# Altium PCB PCB1.PcbDoc
Units mm, origin at the board's own origin, x right, y up, seen from the top; angles counter-clockwise.
Board outline 100 x 50 mm, 2 copper layers (Top Layer, Bottom Layer); 19 components, 19 nets, 54 pads, 0 vias.
Unrouted connection lines stored in the file: 30.
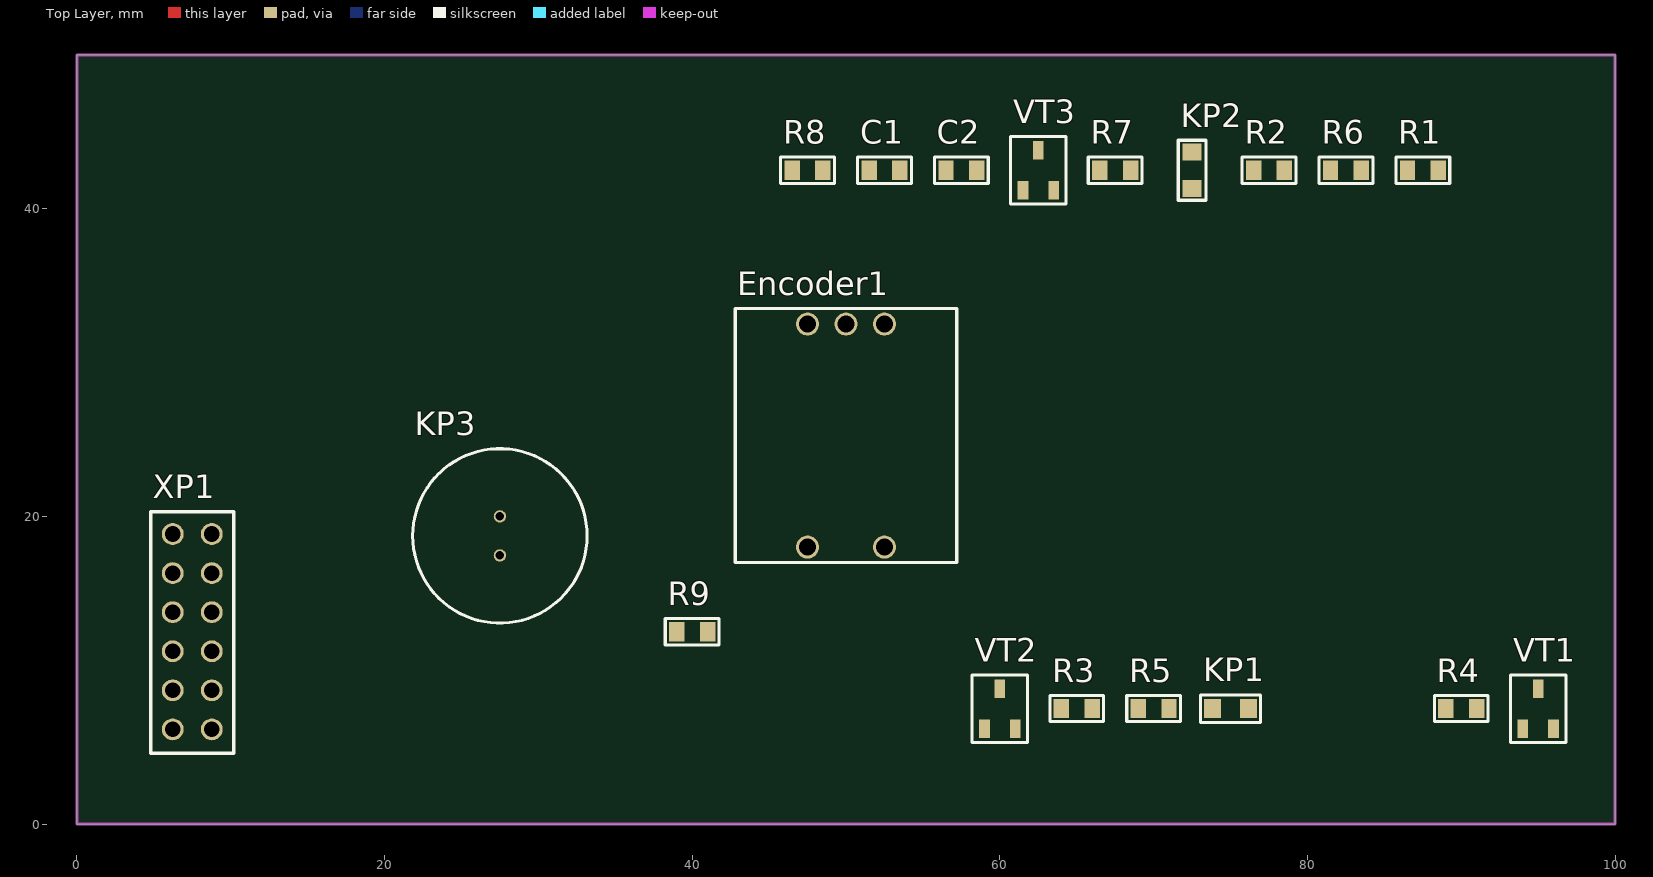
[diagram p0: Top Layer view]
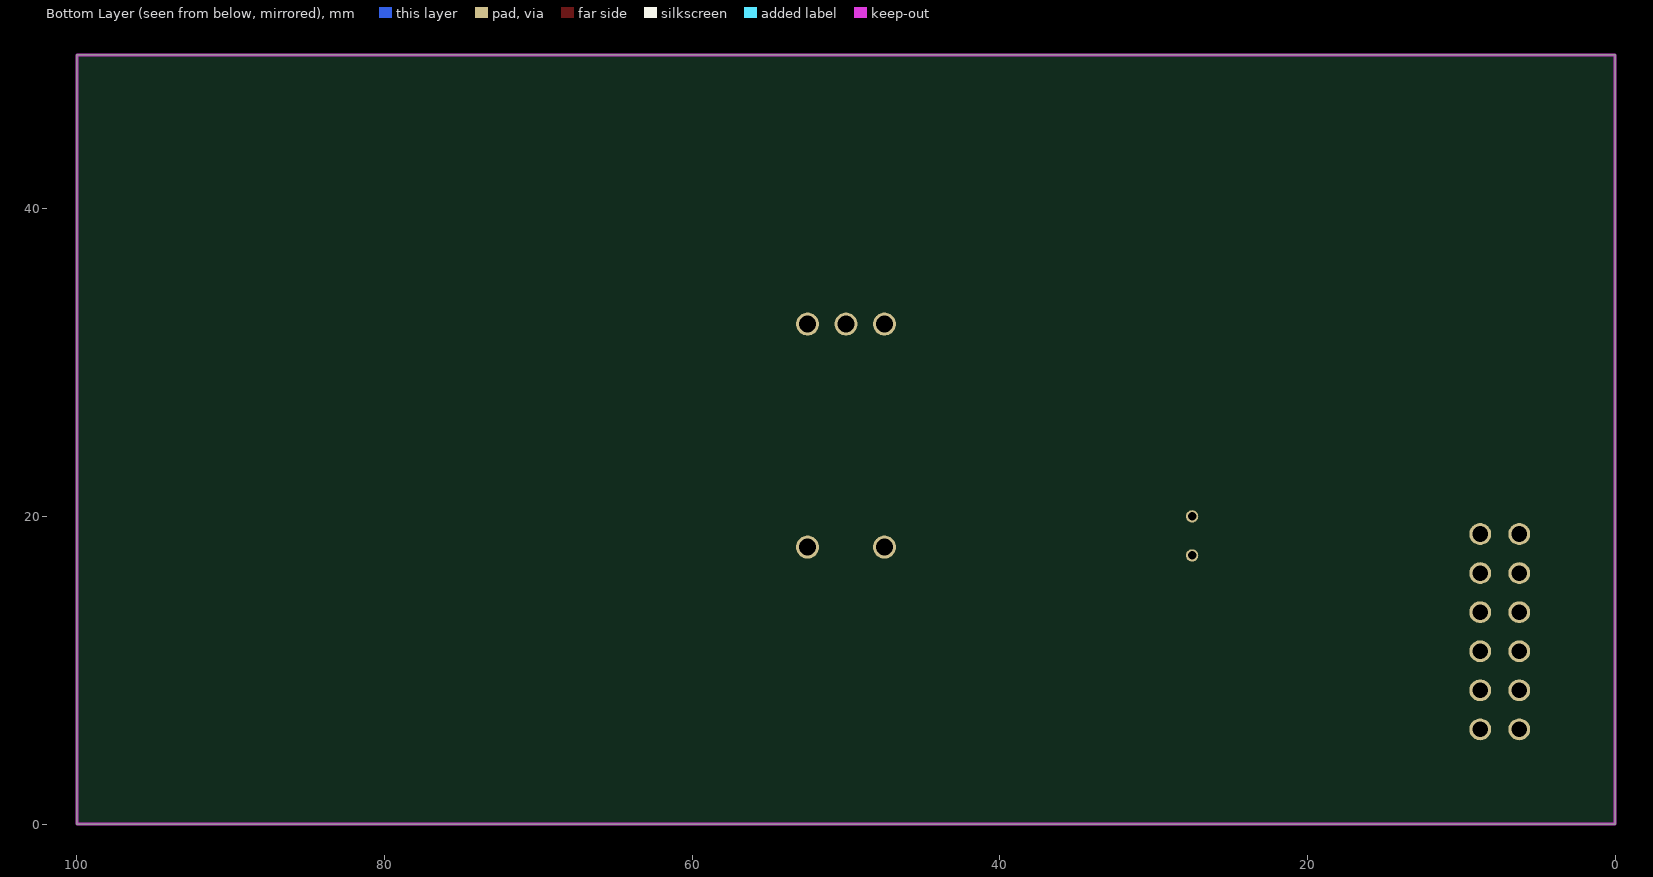
[diagram p1: Bottom Layer view, seen from below]

## Layer stack, top to bottom
Top Solder: solder mask 0.0102, Solder Resist, Dk 3.5
Top Layer: signal copper 0.0356
Dielectric 1: dielectric 0.32, FR-4, Dk 4.8
Bottom Layer: signal copper 0.0356
Bottom Solder: solder mask 0.0102, Solder Resist, Dk 3.5

## Board outline
0,0 100,0 100,50 0,50

## Design rules (kind name [scope] priority, off if disabled: settings)
Clearance [All] p1: gap=0.254 ignorepadtopadclearanceinfootprint=FALSE except(0: Arc-Hole Track-Hole SMDPad-Hole THPad-Hole Via-Hole Fill-Hole Poly-Hole Region-Hole Text-Hole)
PolygonConnect [All] p1: connectstyle=Relief reliefconductorwidth=0.254 reliefentries=4 polygonreliefangle="90 Angle" airgapwidth=0.254
RoutingVias [All] p1: holewidth=0.711 width=1.27 viastyle="Through Hole" minholewidth=0.711 minwidth=1.27 maxholewidth=0.711 maxwidth=1.27
SolderMaskExpansion [All] p1: expansion=0.102
Width [All] p1: maxlimit=0.254 minlimit=0.254 preferedwidth=0.254
30 further rules are at their usual default settings.

## Components (designator, comment, footprint, x,y, rotation, side; value= is the part's Value field where it differs from the comment)
C1 "0.01u" "Cap 0805" 52.5,42.5 r0 top
C2 "0.01u" "Cap 0805" 57.5,42.5 r0 top
Encoder1 "PEC11R-4115K-N0018" PEC11R-4115K-N0018 50,25 r180 top
KP1 "light" "KP LD RED" 75,7.5 r0 top
KP2 "light" "KP LD RED" 72.5,42.5 r90 top
KP3 "light" L-813SRC-B 27.5,18.73 r270 top
R1 "10k" "Res 0805" 87.5,42.5 r0 top
R2 "10k" "Res 0805" 77.5,42.5 r0 top
R3 "10k" "Res 0805" 65,7.5 r0 top
R4 "0.1k" "Res 0805" 90,7.5 r0 top
R5 "1k" "Res 0805" 70,7.5 r0 top
R6 "0.1k" "Res 0805" 82.5,42.5 r0 top
R7 "1k" "Res 0805" 67.5,42.5 r0 top
R8 "0.1k" "Res 0805" 47.5,42.5 r0 top
R9 "1k" "Res 0805" 40,12.5 r0 top
VT1 "bipolar_pnp" SOT-23 95,7.5 r0 top
VT2 "bipolar_pnp" SOT-23 60,7.5 r0 top
VT3 "bipolar_pnp" SOT-23 62.5,42.5 r0 top
XP1 "PBD-12" PBD-12 7.5,12.5 r90 top

## Footprints (in the part's own frame and the unit in brackets; to place one, negate y for a bottom-side part, rotate by r counter-clockwise, add the part's x,y. Pads: shape width x height; smd on the part's side, far side on the other; paste and mask are expansions set on the pad)
"Cap 0805" [mm]
  rect 1x1.25 smd: 1(-1,0) 2(1,0)
  silkscreen extent -1.75,-0.85 1.75,0.85, body extent -1,-0.62 1,0.63, height 1
"KP LD RED" [mm]
  rect 1.1x1.25 smd: 1(-1.175,0) 2(1.175,0)
  silkscreen extent -1.95,-0.9 1.95,0.9, body extent -1.1,-0.72 1.1,0.72, height 0.95
L-813SRC-B [mm]
  round 0.8 hole 0.55: 1(-1.27,0) 2(1.27,0)
  silkscreen extent -5.67,-5.67 5.67,5.67
PBD-12 [mm]
  round 1.42 hole 1.02: 1(-6.35,1.27) 2(-6.35,-1.27) 3(-3.81,1.27) 4(-3.81,-1.27) 5(-1.27,1.27) 6(-1.27,-1.27) 7(1.27,1.27) 8(1.27,-1.27) 9(3.81,1.27) 10(3.81,-1.27) 11(6.35,1.27) 12(6.35,-1.27)
  silkscreen extent -7.9,-2.7 7.8,2.7
PEC11R-4115K-N0018 [mm] "ENCODER"
  round 1.5 hole 1.1: 1(-2.5,-7.5) 2(0,-7.5) 3(2.5,-7.5) 4(-2.5,7) 5(2.5,7)
  silkscreen extent -7.2,-8.5 7.2,8, body extent -6.92,-7.67 6.92,7.18, height 21.5
"Res 0805" [mm]
  rect 1x1.25 smd: 1(-1,0) 2(1,0)
  silkscreen extent -1.75,-0.85 1.75,0.85, body extent -1,-0.62 1,0.63, height 0.78
SOT-23 [mm]
  rect 0.7x1.2 smd: 1(-1,-1.3) 2(1,-1.3) 3(0,1.3)
  silkscreen extent -1.8,-2.2 1.8,2.2, body extent -1.5,-0.7 1.5,0.7, height 1

## Part data
C1 C2: library part Capacitor
Encoder1: library part ENCODER
R1 R2 R3 R4 R5 R6 R7 R8 R9: library part Resistor
XP1: library part "PBD - 12"

## Nets (pads, with @x,y where several pads share a name; then routed paths per layer and width w, separated by ;. In a path a pad name is that pad's centre, name@x,y a point inside that pad or via, vN(x,y) a via of type N, cw(c..) or ccw(c..) an arc to the next point about the centre after c; other vN are vias at no path point)
5V: R3.1 VT1.2 VT2.2 VT3.2 XP1.3
A: Encoder1.1 R1.2
B: Encoder1.3 R2.2
C: C1.2 C2.2 Encoder1.2 Encoder1.5 KP1.2 KP2.2 KP3.2 XP1.1
L1: R5.1 XP1.8
L2: R7.1 XP1.10
L3: R9.1 XP1.12
NetC1_1: C1.1 R1.1 XP1.7
NetC2_1: C2.1 R2.1 XP1.9
NetEncoder1_4: Encoder1.4 R3.2
NetKP1_1: KP1.1 R4.2
NetKP2_1: KP2.1 R6.2
NetKP3_1: KP3.1 R8.2
NetR4_1: R4.1 VT1.3
NetR5_2: R5.2 VT1.1
NetR6_1: R6.1 VT2.3
NetR7_2: R7.2 VT2.1
NetR8_1: R8.1 VT3.3
NetR9_2: R9.2 VT3.1
pads on no net: XP1.2 XP1.4 XP1.5 XP1.6 XP1.11

## Keep-outs
Keep-Out Layer:
  the board outline again, w0.2